# Altium PCB pcb.PcbDoc
Units mm, origin at the board's own origin, x right, y up, seen from the top; angles counter-clockwise.
Board outline 88.52 x 31.24 mm, 2 copper layers (Top Layer, Bottom Layer); 41 components, 14 nets, 98 pads, 108 vias.
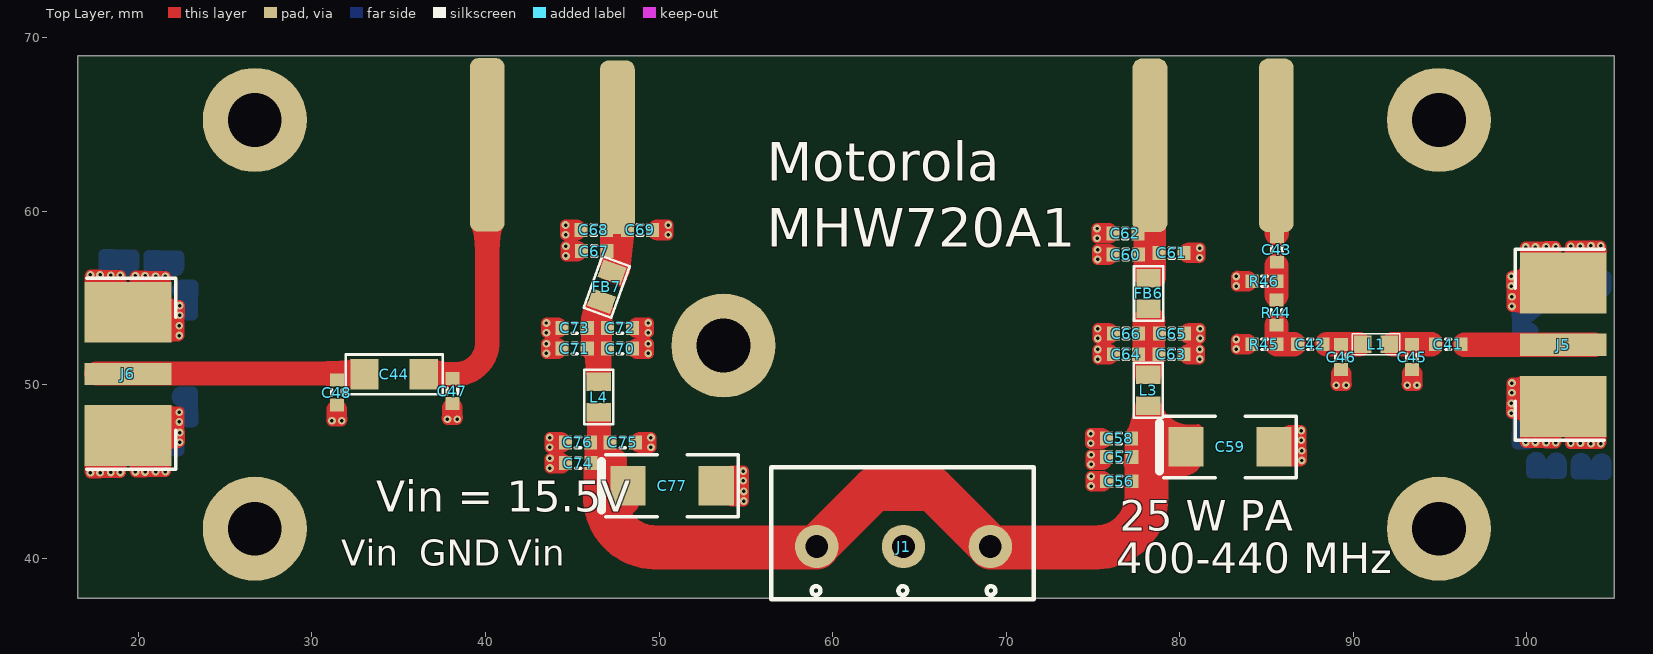
[diagram p0: Top Layer view]
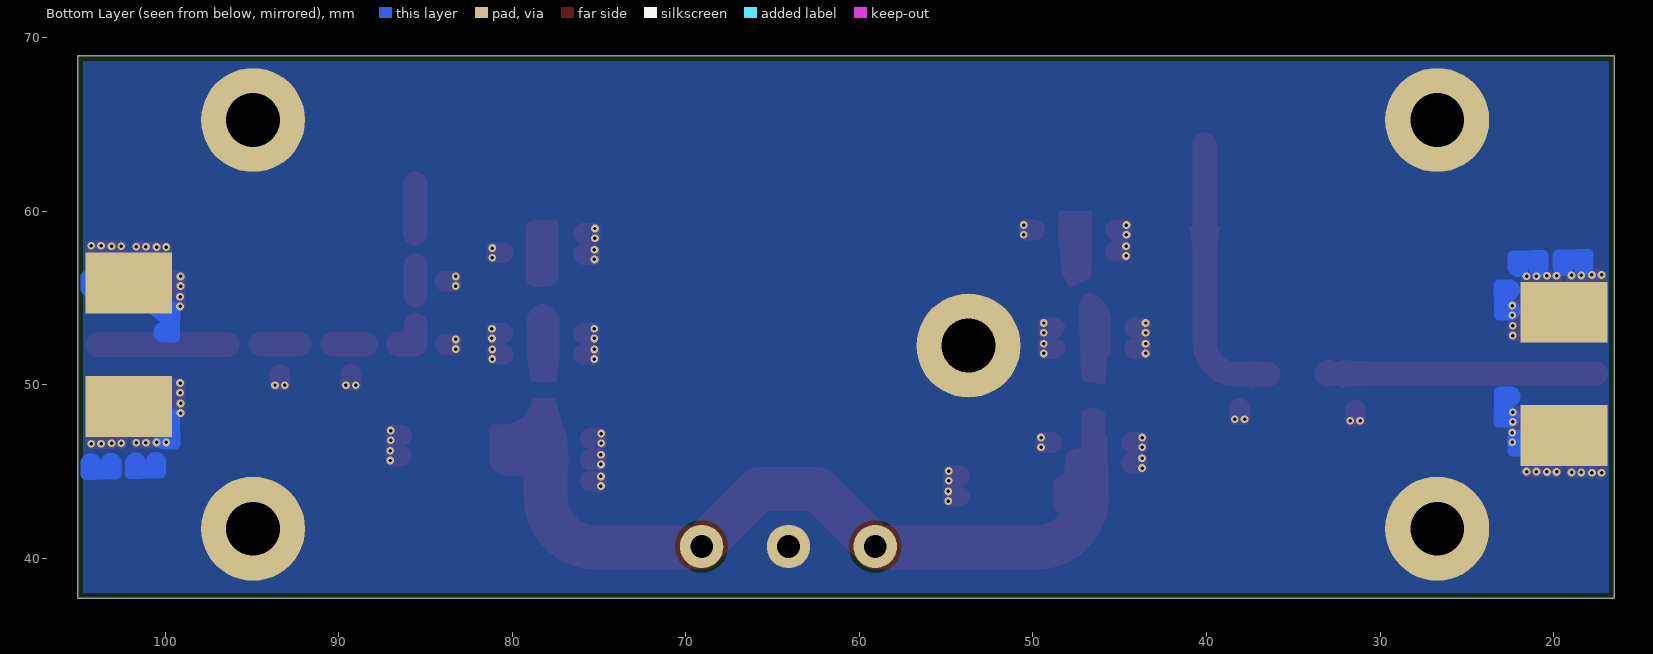
[diagram p1: Bottom Layer view, seen from below]
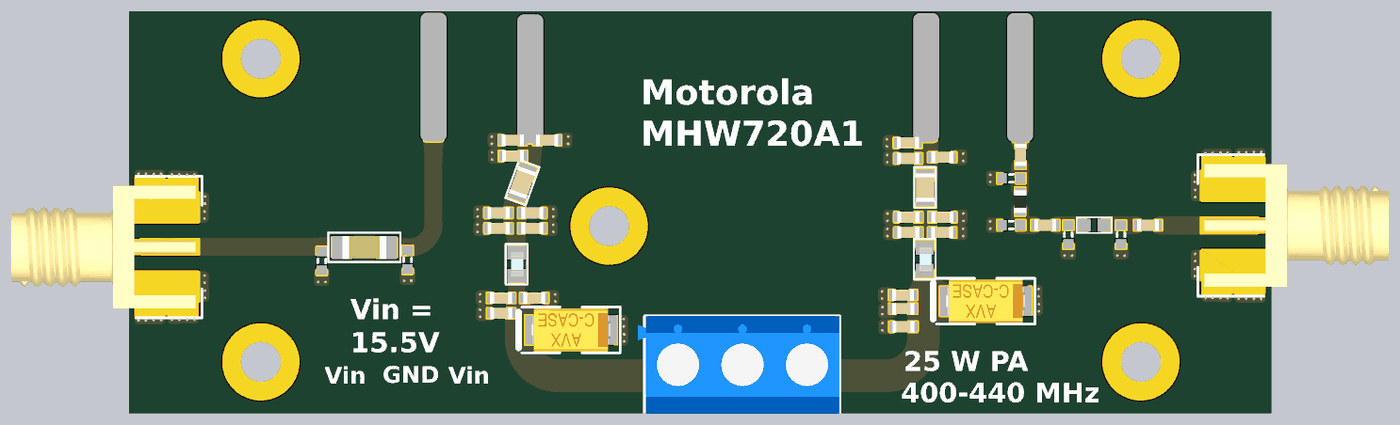
[diagram p2: 3D render of the assembled board from above, using the file's embedded part models]

## Layer stack, top to bottom
Top Solder: solder mask 0.0102, Solder Resist, Dk 3.5
Top Layer: signal copper 0.0356
Dielectric 1: dielectric 0.32, FR-4, Dk 4.8
Bottom Layer: signal copper 0.0356
Bottom Solder: solder mask 0.0102, Solder Resist, Dk 3.5

## Board outline
16.51,37.719 16.51,68.961 105.029,68.961 105.029,37.719

## Design rules (kind name [scope] priority, off if disabled: settings)
BoardOutlineClearance [OnBottomLayer  Or OnTopLayer] p1: gap=0.3 ignorepadtopadclearanceinfootprint=FALSE
Clearance [All] p1: gap=0.127 ignorepadtopadclearanceinfootprint=TRUE except(0.254: Arc-Poly Track-Poly SMDPad-Poly THPad-Poly Via-Poly Fill-Poly Poly-Poly Poly-Region Poly-Text Poly-Hole)
HoleSize [All] p1: absolutevalues=TRUE maxlimit=5.08 minlimit=0.2 maxpercent=80.000 minpercent=20.000
MinimumSolderMaskSliver [All] p1: minsoldermaskwidth=0
PlaneConnect [All] p1: planeconnectstyle=Direct reliefexpansion=0.508 reliefentries=4 reliefconductorwidth=0.254 reliefairgap=0.254
PolygonConnect [All] p1: connectstyle=Direct reliefconductorwidth=0.254 reliefentries=4 polygonreliefangle="90 Angle" airgapwidth=0.254
RoutingVias [All] p1: holewidth=0.2 width=0.45 viastyle="Through Hole" minholewidth=0.2 minwidth=0.45 maxholewidth=0.2 maxwidth=0.45
SilkToSilkClearance [All] p1: silktosilkclearance=0
SilkToSolderMaskClearance [IsPad] p1: minsilkscreentomaskgap=0 clearancetoexposedcopper=TRUE
SolderMaskExpansion [All] p1: expansion=0.102
Width [All] p1: maxlimit=25.4 minlimit=0.127 preferedwidth=0.254 minimp=50.000000 maximp=50.000000 favimp=50.000000
25 further rules are at their usual default settings.

## Components (designator, comment, footprint, x,y, rotation, side; value= is the part's Value field where it differs from the comment)
C41 "Ceramic C0G" C_0603_1608 95.474,52.341 r180 top value=1nF
C42 "Ceramic C0G" C_0603_1608 87.524,52.341 r180 top value=1nF
C43 "Ceramic C0G" C_0603_1608 85.593,57.802 r90 top value=1nF
C44 "Ceramic C0G" C_1206_3216 34.733,50.613 r180 top value=1nF
C45 "-" C_NC_0603_1608 93.391,51.605 r270 top value=NC
C46 "-" C_NC_0603_1608 89.302,51.605 r270 top value=NC
C47 "-" C_NC_0603_1608 38.086,49.648 r270 top value=NC
C48 "-" C_NC_0603_1608 31.431,49.56 r270 top value=NC
C56 "Ceramic C0G" C_0603_1608 76.519,44.452 r180 top value=1nF
C57 "Ceramic X7R" C_0603_1608 76.511,45.847 r180 top value=100nF
C58 "Ceramic X7R" C_0603_1608 76.493,46.915 r180 top value=1uF
C59 "Tantalum Capacitor" CT_2312_6032 82.898,46.431 r180 top value=22uF
C60 "Ceramic C0G" C_0603_1608 76.891,57.515 r180 top value=2.2pF
C61 "Ceramic C0G" C_0603_1608 79.531,57.609 r0 top value=330pF
C62 "Ceramic C0G" C_0603_1608 76.866,58.734 r180 top value=1nF
C63 "Ceramic C0G" C_0603_1608 79.522,51.767 r0 top value=2.2pF
C64 "Ceramic C0G" C_0603_1608 76.906,51.767 r180 top value=1nF
C65 "Ceramic X7R" C_0603_1608 79.547,52.961 r0 top value=100nF
C66 "Ceramic X7R" C_0603_1608 76.906,52.961 r180 top value=1uF
C67 "Ceramic C0G" C_0603_1608 46.26,57.712 r180 top value=2.2pF
C68 "Ceramic C0G" C_0603_1608 46.234,58.931 r180 top value=330pF
C69 "Ceramic C0G" C_0603_1608 48.901,58.931 r0 top value=1nF
C70 "Ceramic C0G" C_0603_1608 47.752,52.095 r0 top value=2.2pF
C71 "Ceramic C0G" C_0603_1608 45.136,52.095 r180 top value=1nF
C72 "Ceramic X7R" C_0603_1608 47.752,53.289 r0 top value=100nF
C73 "Ceramic X7R" C_0603_1608 45.136,53.289 r180 top value=1uF
C74 "Ceramic C0G" C_0603_1608 45.339,45.491 r180 top value=1nF
C75 "Ceramic X7R" C_0603_1608 47.904,46.685 r0 top value=100nF
C76 "Ceramic X7R" C_0603_1608 45.327,46.685 r180 top value=1uF
C77 "Tantalum Capacitor" CT_2312_6032 50.749,44.196 r180 top value=22uF
FB6 "Ferrite bead" FB_0805_2012 78.201,55.272 r270 top value=BLM21PG300SN1D
FB7 "Ferrite bead" FB_0805_2012 46.985,55.651 r250 top value=BLM21PG300SN1D
J1 "ARK3" J_ARK3 64.084,40.691 r180 top value=DG301-5.0-03P-12-18A(H)
J5 "SMA EDGE" J_SMA_EDGE 104.594,52.316 r180 top
J6 "SMA EDGE" J_SMA_EDGE 16.892,50.636 r0 top
L1 "" L_NC_0603_1608 91.308,52.341 r180 top value=NC
L3 "Inductor" L_0805_2012 78.181,49.694 r270 top value=560nH
L4 "Inductor" L_0805_2012 46.529,49.301 r270 top value=560nH
R44 "Resistor" R_0603_1608 85.568,54.17 r90 top value=0R
R45 "Resistor" R_NC_0603_1608 84.882,52.341 r180 top value=NC
R46 "Resistor" R_NC_0603_1608 84.882,55.974 r180 top value=NC

## Footprints (in the part's own frame and the unit in brackets; to place one, negate y for a bottom-side part, rotate by r counter-clockwise, add the part's x,y. Pads: shape width x height; smd on the part's side, far side on the other; paste and mask are expansions set on the pad)
C_0603_1608 [mm]
  rect 0.75x0.8 smd: 1(-0.725,0) 2(0.725,0)
  silkscreen extent -0.15,-0.3 0.15,0.3, body extent -0.85,-0.45 0.85,0.45, height 0.89
C_1206_3216 [mil]
  rect 64x70 smd: 1(-67,0) 2(67,0)
  silkscreen extent -110,-45 110,45, body extent -67,-35 67,35, height 39
C_NC_0603_1608 [mm]
  rect 0.75x0.8 smd: 1(-0.725,0) 2(0.725,0)
  silkscreen extent -0.15,-0.3 0.15,0.3, body extent -0.85,-0.45 0.85,0.45, height 0.89
CT_2312_6032 [mm]
  rect 2.03x2.28 smd: 1(2.54,0) 2(-2.54,0)
  silkscreen extent -3.81,-1.78 4.06,1.78, body extent -3.05,-1.67 3.05,1.68, height 2.7
FB_0805_2012 [mil]
  rect 42x55 smd: 1(-35,0) 2(35,0)
  silkscreen extent -62,-33 62,33, body extent -43,-29 44,29, height 53
J_ARK3 [mm]
  round 2.5 hole 1.3: 1(-5,0) 2(0,0) 3(5,0)
  silkscreen extent -7.49,-4.57 7.62,3.05, body extent -7.46,-4.6 8.14,3, height 10.05
J_SMA_EDGE [mm]
  rect 5x1.27 smd paste-5: 1(2.5,0)
  rect 5x3.5 smd paste-5: 2(2.5,3.556) 2(2.5,-3.556)
  rect 5x3.5 smd far side paste-5: 2(2.5,3.556) 2(2.5,-3.556)
  silkscreen extent 0.13,-5.5 5.25,5.5, body extent -9.53,-4.77 4.75,4.76, height 4.5
L_0805_2012 [mil]
  rect 42x55 smd: 1(-35,0) 2(35,0)
  silkscreen extent -62,-33 62,33, body extent -39,-18 39,23, height 50
L_NC_0603_1608 [mil]
  rect 39x40 smd: 1(-30,0) 2(30,0)
  silkscreen extent -54,-24 54,24, body extent -31,-20 31,20, height 31
R_0603_1608 [mm]
  rect 0.75x0.8 smd: 1(-0.725,0) 2(0.725,0)
  silkscreen extent -0.15,-0.3 0.15,0.3, body extent -0.87,-0.48 0.88,0.47, height 0.54
R_NC_0603_1608 [mm]
  rect 0.75x0.8 smd: 1(-0.725,0) 2(0.725,0)
  silkscreen extent -0.15,-0.3 0.15,0.3, body extent -0.87,-0.48 0.88,0.47, height 0.54

## Part data
C41 C42 C43 C56 C62 C64 C69 C71 C74: library part C_1nF_50V_C0G_0603_5, "Capacitor", dielectric=C0G, Manufacturer=Samsung, Manufacturer Part Number=CL10C102JB8NNNC, Tolerance (%)=5, voltage=50V, HelpURL=http://www.tme.eu/pl/Document/7da762c1dbaf553c64ad9c40d3603826/mlcc_samsung.pdf, Part Number=C_1nF_50V_C0G_0603_5, SCH_Footprint=0603, Supplier 1=TME, Supplier 2="RS Components", Supplier 3=Farnell, Supplier 4=Mouser, Supplier 5=Digi-Key, Supplier Part Number 1=CL10C102JB8NNNC
C44: library part C_1nF_2kV_C0G_1206_10, "Capacitor", dielectric=C0G, Manufacturer=AVX, Manufacturer Part Number=1206GC102KAT1A, Tolerance (%)=10, voltage=2kV, HelpURL=http://www.tme.eu/pl/Document/667fe6e7748c0ed1675574c6bf64b751/AVX_X7R.pdf, Part Number=C_1nF_2kV_C0G_1206_10, SCH_Footprint=1206, Supplier 1=TME, Supplier 2="RS Components", Supplier 3=Farnell, Supplier 4=Mouser, Supplier 5=Digi-Key, Supplier Part Number 1=1206GC102KAT1A
C45 C46 C47 C48: library part C_GENERIC_0603, "Capacitor", Tolerance (%)=0, voltage=0V, dielectric=-, HelpURL=http://-, Manufacturer=-, Manufacturer Part Number=-, Part Number=C_GENERIC_0603, SCH_Footprint=0603, Supplier 1=TME, Supplier 2="RS Components", Supplier 3=Farnell, Supplier 4=Mouser, Supplier 5=Digi-Key
C57 C65 C72 C75: library part C_100nF_50V_X7R_0603_5, "Capacitor", dielectric=X7R, Manufacturer=Samsung, Manufacturer Part Number=CL10B104JB8NNNC, Tolerance (%)=5, voltage=50V, HelpURL=http://www.tme.eu/pl/Document/4a42202b32dab16128fe107dd69598cc/samsung-chip-cap.pdf, Part Number=C_100nF_50V_X7R_0603_5, SCH_Footprint=0603, Supplier 1=TME, Supplier 2="RS Components", Supplier 3=Farnell, Supplier 4=Mouser, Supplier 5=Digi-Key, Supplier Part Number 1=CL10B104JB8NNNC
C58 C66 C73 C76: library part C_1uF_25V_X7R_0603_10, "Capacitor", dielectric=X7R, Manufacturer=Samsung, Manufacturer Part Number=CL10B105KA8NNNC, Tolerance (%)=10, voltage=25V, HelpURL=http://www.tme.eu/pl/Document/4a42202b32dab16128fe107dd69598cc/samsung-chip-cap.pdf, Part Number=C_1uF_25V_X7R_0603_10, SCH_Footprint=0603, Supplier 1=TME, Supplier 2="RS Components", Supplier 3=Farnell, Supplier 4=Mouser, Supplier 5=Digi-Key, Supplier Part Number 1=CL10B105KA8NNNC
C59 C77: library part CT_22uF_16V_TA2O5_2312_10, "Capacitor", dielectric=TA2O5, Manufacturer=Kemet, Manufacturer Part Number=T494C226K016AT, Tolerance (%)=10, voltage=16V, HelpURL=https://content.kemet.com/datasheets/KEM_T2008_T494.pdf, Part Number=CT_22uF_16V_TA2O5_2312_10, SCH_Footprint=2312, Supplier 1=TME, Supplier 2="RS Components", Supplier 3=Farnell, Supplier 4=Mouser, Supplier 5=Digi-Key, Supplier Part Number 1=T494C226K016AT, Supplier Part Number 2=1726639, Supplier Part Number 3=2762195, Supplier Part Number 4=80-T494C226K016, Supplier Part Number 5=399-3845-1-ND
C60 C63 C67 C70: library part C_2.2pF_100V_C0G_0603_5, "Capacitor", dielectric=C0G, Manufacturer=AVX, Manufacturer Part Number=06031A2R2BAT2A, Tolerance (%)=5, voltage=100V, HelpURL=https://datasheet.octopart.com/06031A2R2BAT2A-AVX-datasheet-167032.pdf, Part Number=C_2.2pF_100V_C0G_0603_5, SCH_Footprint=0603, Supplier 1=TME, Supplier 2="RS Components", Supplier 3=Farnell, Supplier 4=Mouser, Supplier 5=Digi-Key, Supplier Part Number 3=2579012, Supplier Part Number 4=581-06031A2R2BAT2A, Supplier Part Number 5=478-3686-1-ND
C61 C68: library part C_330pF_50V_C0G_0603_5, "Capacitor", dielectric=C0G, Manufacturer=Murata, Manufacturer Part Number=GRM1885C1H331JA01D, Tolerance (%)=5, voltage=50V, HelpURL=http://www.mouser.com/ds/2/281/c02e-2905.pdf, Part Number=C_330pF_50V_C0G_0603_5, SCH_Footprint=0603, Supplier 1=TME, Supplier 2="RS Components", Supplier 3=Farnell, Supplier 4=Mouser, Supplier 5=Digi-Key, Supplier Part Number 1=GRM1885C1H331JA01D
FB6 FB7: library part FB_BLM21PG300SN1D, "Ferrite Bead", Current=3A, Manufacturer=Murata, Manufacturer Part Number=BLM21PG300SN1D, Resistance=30R, HelpURL=http://www.mouser.com/ds/2/281/c31e-794748.pdf, Part Number=FB_BLM21PG300SN1D, SCH_Footprint=0805, Supplier 1=TME, Supplier 2="RS Components", Supplier 3=Farnell, Supplier 4=Mouser, Supplier 5=Digi-Key, Supplier Part Number 1=BLM21PG300SN1D, Supplier Part Number 2=7241536, Supplier Part Number 3=1515662, Supplier Part Number 4=81-BLM21P300S, Supplier Part Number 5=490-1052-1-ND
J1: library part J_TB-5.0-P-3P, "ARK Screw terminal, 3-Pin", Manufacturer="DEGSON ELECTRONICS", Manufacturer Part Number=DG301-5.0-03P-12-18A(H), Supplier Part Number 1=DG301-5.0-3/6B, Component Type=Standard, HelpURL=https://datasheet.octopart.com/DG301-5.0-03P-12-18A%28H%29-Degson-datasheet-17801202.pdf, Part Number=J_TB-5.0-P-3P, SCH_Footprint=ARK3, Supplier 1=TME, Supplier 2="RS Components", Supplier 3=Farnell, Supplier 4=Mouser, Supplier 5=Digi-Key
J5 J6: library part J_SMA_EDGE_UNIVERSAL, "SMA connector", Component Type=Standard, Part Number=J_SMA_EDGE_UNIVERSAL, SCH_Footprint="SMA EDGE", Supplier 1=TME, Supplier 2="RS Components", Supplier 3=Farnell, Supplier 4=Mouser, Supplier 5=Digi-Key
L1: library part L_0603, "Induction", Part Number=L_0603, SCH_Footprint=0603, Supplier 1=TME, Supplier 2="RS Components", Supplier 3=Farnell, Supplier 4=Mouser, Supplier 5=Digi-Key
L3 L4: library part L_560nH_1.7A_0805, "Induction", Current=1.7A, Manufacturer=Wurth, Manufacturer Part Number=74479974156, Resistance=100mR, HelpURL=https://datasheet.octopart.com/74479974156-W%C3%BCrth-Elektronik-datasheet-62333476.pdf, Part Number=L_560nH_1.7A_0805, SCH_Footprint=0805, Supplier 1=TME, Supplier 2="RS Components", Supplier 3=Farnell, Supplier 4=Mouser, Supplier 5=Digi-Key, Supplier Part Number 2=923-6378, Supplier Part Number 3=2543275, Supplier Part Number 4=710-74479974156, Supplier Part Number 5=732-9693-1-ND
R44: library part R_0R_0603_5, Manufacturer=Samsung, Manufacturer Part Number=RC1608J000CS, Power=100mW, Tolerance=5%, voltage=50V, HelpURL=http://www.samsungsem.com/kr/support/product-search/chip-resistor/RC1608J000CS.jsp, Part Number=R_0R_0603_5, SCH_Footprint=0603, Supplier 1=TME, Supplier 2="RS Components", Supplier 3=Farnell, Supplier 4=Mouser, Supplier 5=Digi-Key, Supplier Part Number 5=1276-3510-1-ND
R45 R46: library part R_GENERIC_0603, Part Number=R_GENERIC_0603, SCH_Footprint=0603, Supplier 1=TME, Supplier 2="RS Components", Supplier 3=Farnell, Supplier 4=Mouser, Supplier 5=Digi-Key

## Free pads (board coordinates)
  round 6 hole 3.1: 6(26.708,41.719) 6(26.708,65.266) 6(53.708,52.266) 6(94.933,41.719) 6(94.933,65.266)
  rrect50% 2x10 smd: in(85.568,63.8) out(40.095,63.837) Vcc1(78.287,63.8) Vcc2(47.6,63.7)

## Via types
v1: diameter 0.45, hole 0.2, Top Layer to Bottom Layer, tented both sides, 108 vias

## Nets (pads, with @x,y where several pads share a name; then routed paths per layer and width w, separated by ;. In a path a pad name is that pad's centre, name@x,y a point inside that pad or via, vN(x,y) a via of type N, cw(c..) or ccw(c..) an arc to the next point about the centre after c; other vN are vias at no path point)
GND: C45.2 C46.2 C47.2 C48.2 C56.2 C57.2 C58.2 C59.2 C60.2 C61.2 C62.2 C63.2 C64.2 C65.2 C66.2 C67.2 C68.2 C69.2 C70.2 C71.2 C72.2 C73.2 C74.2 C75.2 C76.2 C77.2 J1.2 J5.2 J6.2 pad.6 R45.2 R46.2 | length 224.7
  Top Layer w0.635: J6.2@17.233,45.556 v1(17.233,44.935) v1(17.792,44.935) ; J6.2@17.512,45.836 cw(c17.512,45.556) 17.792,45.556 v1(17.792,44.935) ; v1(17.792,44.935) cw(c17.817,44.935) 17.817,44.961 v1(18.401,44.961) ; v1(17.792,56.338) ccw(c17.817,56.338) 17.817,56.312 v1(18.401,56.312) ; v1(17.792,56.338) 17.792,55.716 cw(c17.512,55.716) 17.512,55.437 cw(c17.512,55.716) 17.233,55.716 v1(17.233,56.338) v1(17.792,56.338) ; v1(18.401,44.961) 18.401,45.582 cw(c18.681,45.582) 18.681,45.861 cw(c18.681,45.582) 18.96,45.582 v1(18.96,44.961) v1(18.401,44.961) ; v1(18.401,56.312) 18.401,55.691 ccw(c18.681,55.691) 18.681,55.412 ccw(c18.681,55.691) 18.96,55.691 v1(18.96,56.312) v1(18.401,56.312) ; v1(20.383,44.986) cw(c20.408,44.986) 20.408,45.011 v1(20.992,45.011) ; v1(20.383,44.986) 20.383,45.607 ccw(c20.103,45.607) 20.103,45.887 ccw(c20.103,45.607) 19.824,45.607 v1(19.824,44.986) v1(20.383,44.986) ; v1(20.383,56.287) ccw(c20.408,56.287) 20.408,56.261 v1(20.992,56.261) ; v1(20.383,56.287) 20.383,55.666 cw(c20.103,55.666) 20.103,55.386 cw(c20.103,55.666) 19.824,55.666 v1(19.824,56.287) v1(20.383,56.287) ; v1(20.992,45.011) 20.992,45.633 cw(c21.272,45.633) 21.272,45.912 cw(c21.272,45.633) 21.551,45.633 v1(21.551,45.011) v1(20.992,45.011) ; v1(20.992,56.261) 20.992,55.64 ccw(c21.272,55.64) 21.272,55.361 ccw(c21.272,55.64) 21.551,55.64 v1(21.551,56.261) v1(20.992,56.261) ; v1(22.35,47.868) 22.35,47.284 ccw(c22.375,47.284) v1(22.375,47.258) ; v1(22.35,47.868) 21.729,47.868 cw(c21.729,48.147) 21.449,48.147 cw(c21.729,48.147) 21.729,48.427 v1(22.35,48.427) v1(22.35,47.868) ; v1(22.35,53.405) 22.35,53.989 cw(c22.375,53.989) v1(22.375,54.015) ; v1(22.35,53.405) 21.729,53.405 ccw(c21.729,53.126) 21.449,53.126 ccw(c21.729,53.126) 21.729,52.846 v1(22.35,52.846) v1(22.35,53.405) ; v1(22.375,47.258) v1(22.375,46.699) 21.754,46.699 cw(c21.754,46.979) 21.475,46.979 cw(c21.754,46.979) 21.754,47.258 v1(22.375,47.258) ; v1(22.375,54.015) v1(22.375,54.573) 21.754,54.573 ccw(c21.754,54.294) 21.475,54.294 ccw(c21.754,54.294) 21.754,54.015 v1(22.375,54.015) ; v1(54.85,44.475) 54.229,44.475 cw(c54.229,44.755) 53.95,44.755 cw(c54.229,44.755) 54.229,45.034 v1(54.85,45.034) v1(54.85,44.475) ; v1(54.85,44.475) 54.85,43.891 ccw(c54.876,43.891) v1(54.876,43.866) ; v1(54.876,43.866) v1(54.876,43.307) 54.254,43.307 cw(c54.254,43.586) 53.975,43.586 cw(c54.254,43.586) 54.254,43.866 v1(54.876,43.866) ; v1(86.999,46.814) 86.378,46.814 cw(c86.378,47.093) 86.098,47.093 cw(c86.378,47.093) 86.378,47.373 v1(86.999,47.373) v1(86.999,46.814) ; v1(86.999,46.814) 86.999,46.23 ccw(c87.024,46.23) v1(87.024,46.204) ; v1(87.024,46.204) 86.403,46.204 ccw(c86.403,45.925) 86.124,45.925 ccw(c86.403,45.925) 86.403,45.645 v1(87.024,45.645) v1(87.024,46.204) ; v1(99.111,48.938) ccw(c99.111,48.963) 99.136,48.963 v1(99.136,49.547) ; v1(99.111,48.938) 99.732,48.938 cw(c99.732,48.658) 100.012,48.658 cw(c99.732,48.658) 99.732,48.379 v1(99.111,48.379) v1(99.111,48.938) ; v1(99.111,55.694) cw(c99.111,55.669) 99.136,55.669 v1(99.136,55.085) ; v1(99.111,55.694) 99.732,55.694 ccw(c99.732,55.974) 100.012,55.974 ccw(c99.732,55.974) 99.732,56.253 v1(99.111,56.253) v1(99.111,55.694) ; v1(99.136,49.547) 99.758,49.547 ccw(c99.758,49.827) 100.037,49.827 ccw(c99.758,49.827) 99.758,50.106 v1(99.136,50.106) v1(99.136,49.547) ; v1(99.136,55.085) 99.758,55.085 cw(c99.758,54.805) 100.037,54.805 cw(c99.758,54.805) 99.758,54.526 v1(99.136,54.526) v1(99.136,55.085) ; v1(100.494,46.691) 100.494,47.312 ccw(c100.215,47.312) 100.215,47.592 ccw(c100.215,47.312) 99.935,47.312 v1(99.935,46.691) v1(100.494,46.691) ; v1(100.494,46.691) 101.078,46.691 cw(c101.078,46.666) v1(101.104,46.666) ; v1(100.494,57.941) 101.078,57.941 ccw(c101.078,57.966) v1(101.104,57.966) ; v1(100.494,57.941) v1(99.935,57.941) 99.935,57.32 ccw(c100.215,57.32) 100.215,57.04 ccw(c100.215,57.32) 100.494,57.32 v1(100.494,57.941) ; v1(101.104,46.666) 101.104,47.287 cw(c101.383,47.287) 101.383,47.566 cw(c101.383,47.287) 101.663,47.287 v1(101.663,46.666) v1(101.104,46.666) ; v1(101.104,57.966) 101.104,57.345 ccw(c101.383,57.345) 101.383,57.066 ccw(c101.383,57.345) 101.663,57.345 v1(101.663,57.966) v1(101.104,57.966) ; v1(103.085,46.64) 103.085,47.261 ccw(c102.806,47.261) 102.806,47.541 ccw(c102.806,47.261) 102.526,47.261 v1(102.526,46.64) v1(103.085,46.64) ; v1(103.085,46.64) 103.669,46.64 cw(c103.669,46.615) v1(103.695,46.615) ; v1(103.085,57.992) 103.669,57.992 ccw(c103.669,58.017) v1(103.695,58.017) ; v1(103.085,57.992) v1(102.526,57.992) 102.526,57.371 ccw(c102.806,57.371) 102.806,57.091 ccw(c102.806,57.371) 103.085,57.371 v1(103.085,57.992) ; v1(103.695,46.615) 103.695,47.236 cw(c103.974,47.236) 103.974,47.515 cw(c103.974,47.236) 104.253,47.236 v1(104.253,46.615) v1(103.695,46.615) ; v1(103.695,58.017) 103.695,57.396 ccw(c103.974,57.396) 103.974,57.117 ccw(c103.974,57.396) 104.253,57.396 v1(104.253,58.017) v1(103.695,58.017) ; v1(31.152,47.935) 31.152,48.556 cw(c31.431,48.556) C48.2 cw(c31.431,48.556) 31.711,48.556 v1(31.711,47.935) v1(31.152,47.935) ; v1(37.807,48.022) 37.807,48.644 cw(c38.086,48.644) C47.2 cw(c38.086,48.644) 38.366,48.644 v1(38.366,48.022) v1(37.807,48.022) ; v1(43.51,51.816) 44.131,51.816 ccw(c44.131,52.095) C71.2 ccw(c44.131,52.095) 44.131,52.375 v1(43.51,52.375) v1(43.51,51.816) ; v1(43.51,53.01) 44.131,53.01 ccw(c44.131,53.289) C73.2 ccw(c44.131,53.289) 44.131,53.569 v1(43.51,53.569) v1(43.51,53.01) ; v1(43.702,46.406) 44.323,46.406 ccw(c44.323,46.685) C76.2 ccw(c44.323,46.685) 44.323,46.965 v1(43.702,46.965) v1(43.702,46.406) ; v1(43.713,45.212) 44.335,45.212 ccw(c44.335,45.491) C74.2 ccw(c44.335,45.491) 44.335,45.771 v1(43.713,45.771) v1(43.713,45.212) ; v1(44.609,58.651) 45.23,58.651 ccw(c45.23,58.931) C68.2 ccw(c45.23,58.931) 45.23,59.21 v1(44.609,59.21) v1(44.609,58.651) ; v1(44.634,57.432) 45.255,57.432 ccw(c45.255,57.712) C67.2 ccw(c45.255,57.712) 45.255,57.991 v1(44.634,57.991) v1(44.634,57.432) ; C70.2 cw(c48.756,52.095) 48.756,52.375 v1(49.378,52.375) v1(49.378,51.816) 48.756,51.816 cw(c48.756,52.095) C70.2 ; C72.2 cw(c48.756,53.289) 48.756,53.569 v1(49.378,53.569) v1(49.378,53.01) 48.756,53.01 cw(c48.756,53.289) C72.2 ; C75.2 cw(c48.909,46.685) 48.909,46.965 v1(49.53,46.965) v1(49.53,46.406) 48.909,46.406 cw(c48.909,46.685) C75.2 ; C69.2 cw(c49.906,58.931) 49.906,59.21 v1(50.527,59.21) v1(50.527,58.651) 49.906,58.651 cw(c49.906,58.931) C69.2 ; v1(74.868,46.636) 75.489,46.636 ccw(c75.489,46.915) C58.2 ccw(c75.489,46.915) 75.489,47.195 v1(74.868,47.195) v1(74.868,46.636) ; v1(74.893,44.172) 75.514,44.172 ccw(c75.514,44.452) C56.2 ccw(c75.514,44.452) 75.514,44.731 v1(74.893,44.731) v1(74.893,44.172) ; v1(74.893,45.417) 75.514,45.417 ccw(c75.514,45.696) 75.794,45.696 ccw(c75.514,45.696) 75.514,45.976 v1(74.893,45.976) v1(74.893,45.417) ; v1(75.24,58.455) 75.861,58.455 ccw(c75.861,58.734) C62.2 ccw(c75.861,58.734) 75.861,59.014 v1(75.24,59.014) v1(75.24,58.455) ; v1(75.266,57.236) 75.887,57.236 ccw(c75.887,57.515) C60.2 ccw(c75.887,57.515) 75.887,57.794 v1(75.266,57.794) v1(75.266,57.236) ; v1(75.28,51.487) 75.901,51.487 ccw(c75.901,51.767) C64.2 ccw(c75.901,51.767) 75.901,52.046 v1(75.28,52.046) v1(75.28,51.487) ; v1(75.28,52.681) 75.901,52.681 ccw(c75.901,52.961) C66.2 ccw(c75.901,52.961) 75.901,53.24 v1(75.28,53.24) v1(75.28,52.681) ; C63.2 cw(c80.526,51.767) 80.526,52.046 v1(81.147,52.046) v1(81.147,51.487) 80.526,51.487 cw(c80.526,51.767) C63.2 ; C61.2 cw(c80.536,57.609) 80.536,57.888 v1(81.157,57.888) v1(81.157,57.329) 80.536,57.329 cw(c80.536,57.609) C61.2 ; C65.2 cw(c80.552,52.961) 80.552,53.24 v1(81.173,53.24) v1(81.173,52.681) 80.552,52.681 cw(c80.552,52.961) C65.2 ; v1(83.257,52.062) 83.878,52.062 ccw(c83.878,52.341) R45.2 ccw(c83.878,52.341) 83.878,52.621 v1(83.257,52.621) v1(83.257,52.062) ; v1(83.257,55.694) 83.878,55.694 ccw(c83.878,55.974) R46.2 ccw(c83.878,55.974) 83.878,56.253 v1(83.257,56.253) v1(83.257,55.694) ; v1(89.022,49.979) 89.022,50.6 cw(c89.302,50.6) C46.2 cw(c89.302,50.6) 89.581,50.6 v1(89.581,49.979) v1(89.022,49.979) ; v1(93.112,49.979) 93.112,50.6 cw(c93.391,50.6) C45.2 cw(c93.391,50.6) 93.671,50.6 v1(93.671,49.979) v1(93.112,49.979)
  Bottom Layer w0.635: J6.2@18.567,46.115 cw(c18.593,46.115) 18.593,46.14 J6.2@19.177,46.14 ; J6.2@18.567,46.115 18.567,46.736 ccw(c18.288,46.736) 18.288,47.015 ccw(c18.288,46.736) 18.009,46.736 18.009,46.115 J6.2@18.567,46.115 ; 18.567,57.517 ccw(c18.593,57.517) 18.593,57.492 19.177,57.492 ; 18.567,57.517 18.009,57.517 18.009,56.896 ccw(c18.288,56.896) 18.288,56.617 ccw(c18.288,56.896) 18.567,56.896 18.567,57.517 ; J6.2@19.177,46.14 19.177,46.761 cw(c19.456,46.761) 19.456,47.041 cw(c19.456,46.761) 19.736,46.761 19.736,46.14 J6.2@19.177,46.14 ; 19.177,57.492 19.177,56.871 ccw(c19.456,56.871) 19.456,56.591 ccw(c19.456,56.871) 19.736,56.871 19.736,57.492 19.177,57.492 ; J6.2@21.158,46.166 cw(c21.184,46.166) 21.184,46.191 J6.2@21.768,46.191 ; J6.2@21.158,46.166 21.158,46.787 ccw(c20.879,46.787) 20.879,47.066 ccw(c20.879,46.787) 20.599,46.787 20.599,46.166 J6.2@21.158,46.166 ; 21.158,57.466 ccw(c21.184,57.466) 21.184,57.441 21.768,57.441 ; 21.158,57.466 20.599,57.466 20.599,56.845 ccw(c20.879,56.845) 20.879,56.566 ccw(c20.879,56.845) 21.158,56.845 21.158,57.466 ; J6.2@21.768,46.191 21.768,46.812 cw(c22.047,46.812) 22.047,47.092 cw(c22.047,46.812) 22.327,46.812 22.327,46.191 J6.2@21.768,46.191 ; 21.768,57.441 21.768,56.82 ccw(c22.047,56.82) 22.047,56.54 ccw(c22.047,56.82) 22.327,56.82 22.327,57.441 21.768,57.441 ; 23.126,49.047 23.126,48.463 ccw(c23.151,48.463) 23.151,48.438 ; 23.126,49.047 22.504,49.047 cw(c22.504,49.327) 22.225,49.327 cw(c22.504,49.327) 22.504,49.606 23.126,49.606 23.126,49.047 ; 23.126,54.585 22.504,54.585 ccw(c22.504,54.305) 22.225,54.305 ccw(c22.504,54.305) 22.504,54.026 23.126,54.026 23.126,54.585 ; 23.126,54.585 23.126,55.169 cw(c23.151,55.169) 23.151,55.194 ; 23.151,48.438 22.53,48.438 ccw(c22.53,48.158) 22.25,48.158 ccw(c22.53,48.158) 22.53,47.879 23.151,47.879 23.151,48.438 ; 23.151,55.194 23.151,55.753 22.53,55.753 ccw(c22.53,55.474) 22.25,55.474 ccw(c22.53,55.474) 22.53,55.194 23.151,55.194 ; 99.429,47.168 ccw(c99.429,47.193) 99.455,47.193 99.455,47.777 ; 99.429,47.168 100.051,47.168 cw(c100.051,46.888) 100.33,46.888 cw(c100.051,46.888) 100.051,46.609 99.429,46.609 99.429,47.168 ; 99.429,53.924 cw(c99.429,53.899) 99.455,53.899 99.455,53.315 ; 99.429,53.924 100.051,53.924 ccw(c100.051,54.204) 100.33,54.204 ccw(c100.051,54.204) 100.051,54.483 99.429,54.483 99.429,53.924 ; 99.455,47.777 100.076,47.777 ccw(c100.076,48.057) 100.355,48.057 ccw(c100.076,48.057) 100.076,48.336 99.455,48.336 99.455,47.777 ; 99.455,53.315 100.076,53.315 cw(c100.076,53.035) 100.355,53.035 cw(c100.076,53.035) 100.076,52.756 99.455,52.756 99.455,53.315 ; 100.813,44.921 100.813,45.542 ccw(c100.533,45.542) 100.533,45.822 ccw(c100.533,45.542) 100.254,45.542 100.254,44.921 100.813,44.921 ; 100.813,44.921 101.397,44.921 cw(c101.397,44.896) 101.422,44.896 ; J5.2@100.813,56.171 101.397,56.171 ccw(c101.397,56.196) J5.2@101.422,56.196 ; J5.2@100.813,56.171 100.813,55.55 cw(c100.533,55.55) 100.533,55.27 cw(c100.533,55.55) 100.254,55.55 100.254,56.171 J5.2@100.813,56.171 ; 101.422,44.896 101.422,45.517 cw(c101.702,45.517) 101.702,45.796 cw(c101.702,45.517) 101.981,45.517 101.981,44.896 101.422,44.896 ; J5.2@101.422,56.196 101.422,55.575 ccw(c101.702,55.575) 101.702,55.296 ccw(c101.702,55.575) 101.981,55.575 101.981,56.196 J5.2@101.422,56.196 ; 103.403,44.87 103.403,45.491 ccw(c103.124,45.491) 103.124,45.771 ccw(c103.124,45.491) 102.845,45.491 102.845,44.87 103.403,44.87 ; 103.403,44.87 103.988,44.87 cw(c103.988,44.845) 104.013,44.845 ; J5.2@103.403,56.222 103.403,55.601 cw(c103.124,55.601) 103.124,55.321 cw(c103.124,55.601) 102.845,55.601 102.845,56.222 J5.2@103.403,56.222 ; J5.2@103.403,56.222 103.988,56.222 ccw(c103.988,56.247) J5.2@104.013,56.247 ; 104.013,44.845 104.013,45.466 cw(c104.292,45.466) 104.292,45.745 cw(c104.292,45.466) 104.572,45.466 104.572,44.845 104.013,44.845 ; J5.2@104.013,56.247 104.013,55.626 ccw(c104.292,55.626) 104.292,55.347 ccw(c104.292,55.626) 104.572,55.626 104.572,56.247 J5.2@104.013,56.247
in: C43.2 pad.in | length 2.9
  Top Layer w1.397: C43.2@85.593,58.742 pad.in@85.593,61.6
NetC41_1: C41.1 J5.1 | length 7.5
  Top Layer w1.397: C41.1@96.4,52.316 J5.1 J5.1@103.898,52.316
NetC41_2: C41.2 C45.1 L1.1 | length 2.2
  Top Layer w1.397: L1.1@92.274,52.341 C41.2@94.509,52.341
NetC42_1: C42.1 C46.1 L1.2 | length 1.9
  Top Layer w1.397: C42.1@88.464,52.341 89.403,52.341 L1.2@90.348,52.341
NetC42_2: C42.2 R44.1 R45.1 | length 2.1
  Top Layer w1.143: R45.1@85.568,52.381 ccw(c85.607,52.381) R45.1
  Top Layer w1.397: R45.1@85.568,52.381 R44.1 ; R45.1 C42.2@86.584,52.341
NetC43_1: C43.1 R44.2 R46.1 | length 1.7
  Top Layer w1.397: R44.2@85.568,55.161 C43.1@85.568,56.888
NetC44_2: C44.2 C48.1 J6.1 | length 15.6
  Top Layer w1.397: J6.1@17.563,50.662 C44.2@32.905,50.662 ; C44.2@32.905,50.74 cw(c32.905,50.613) C44.2@33.021,50.664 ; C44.2 ccw(c32.905,50.613) C44.2@33.021,50.664 ; C44.2@33.108,50.664 C44.2@33.021,50.664
NetC63_1: C63.1 C64.1 C65.1 C66.1 FB6.2 L3.1
NetC70_1: C70.1 C71.1 C72.1 C73.1 FB7.2 L4.1
out: C44.1 C47.1 pad.out | length 16.1
  Top Layer w1.397: C44.1 38.264,50.613 ccw(c38.264,52.449) 40.095,52.317 ; 40.095,52.292 40.095,52.317 ; 40.095,52.439 pad.out ; 40.1,52.449 cw(c38.264,52.449) 40.095,52.317
Vcc1: C60.1 C61.1 C62.1 FB6.1 pad.Vcc1
Vcc2: C67.1 C68.1 C69.1 FB7.1 pad.Vcc2
Vin: C56.1 C57.1 C58.1 C59.1 C74.1 C75.1 C76.1 C77.1 J1.1 J1.3 L3.2 L4.2 | length 45.7
  Top Layer w1.27: 47.213,42.212 48.209,43.208 C77.1 cw(c47.65,44.196) C77.1@47.65,43.637
  Top Layer w2.54: 46.893,43.532 ccw(c49.784,43.532) 46.914,43.188 ; 46.914,45.136 46.914,44.196 46.914,43.188 ; J1.3@59.084,40.642 49.784,40.642 cw(c49.784,43.532) 47.213,42.212 cw(c49.784,43.532) 46.914,43.188 ; J1.3 62.386,43.993 65.782,43.993 J1.1 ; J1.1@69.084,40.642 75.184,40.642 ccw(c75.184,43.532) 78.075,43.532 78.075,46.837

## Polygon pours and split planes (outlines as drawn)
GND on Bottom Layer "Bottom Layer-GND" (solid, remove dead copper, pour order 4): 16.098,37.719 104.849,37.719 104.826,68.961 15.873,68.961

## Other copper
Top Layer:
  region net Vcc1: 77.601,59.514 ccw(c77.601,59.26) 77.347,59.26 77.347,56.364 ccw(c78.058,56.364) 78.058,55.653 78.693,55.653 ccw(c78.693,56.161) 79.201,56.161 79.201,59.031 ccw(c78.744,59.031) 78.744,59.488
  region net NetC63_1: 78.243,54.671 ccw(c78.38,53.583) 77.292,53.445 77.292,51.435 77.495,50.14 78.865,50.19 79.146,51.511 79.146,53.492 ccw(c78.105,53.63)
  region net Vin: 48.133,45.11 48.133,45.669 ccw(c47.473,45.669) 47.473,46.33 cw(c47.473,46.584) 47.219,46.584 47.219,48.354 ccw(c46.694,48.091) 46.431,48.616 46.101,48.539 ccw(c46.101,48.311) 45.872,48.311 45.872,47.142 cw(c45.72,47.142) 45.72,46.99 45.72,44.653 ccw(c47.295,44.653) 47.295,43.078
  region net NetC70_1: 45.872,50.038 45.75,51.405 ccw(c45.479,51.443) 45.517,51.714 45.517,53.7 cw(c47.146,53.746) 46.655,55.3 cw(c46.59,54.573) 47.317,54.508 47.205,50.456 cw(c46.935,50.456) 46.935,50.186
  region net Vcc2: 47.9,55.6 48.3,56.5 48.553,58.5 48.52,59.896 ccw(c48.419,59.896) 48.419,59.998 46.615,59.998 46.615,57.3 46.655,56.136
  region net Vin: 77.555,49.225 77.013,47.295 ccw(c76.979,47.214) 76.898,47.18 76.81,45.804 ccw(c77.601,45.554) 77.351,44.762 80.252,44.762 ccw(c80.252,45.804) 81.294,45.804 81.294,47.459 ccw(c81.019,47.459) 81.019,47.734 cw(c80.624,49.517) 78.842,49.124 78.842,49.276

## Silkscreen, mask and mechanical layers (free items; w line width, h text height)
Top Overlay:
  text "Motorola / MHW720A1" at 56.2,57.2 h3.81
  text "Vin = 15.5V" at 33.7,42.1 h3.05
  text "25 W PA" at 76.53,41.021 h3
  text "Vin" at 31.691,39.095 h2.54
  text "GND" at 36.185,39.095 h2.54
  text "Vin" at 41.291,39.095 h2.54
  text "400-440 MHz" at 76.327,38.583 h3
Bottom Solder:
  region: 22.771,69.291 22.771,37.744 98.996,37.744 98.996,69.291
Mechanical 1:
  the board outline again, w0.254

## Text inside footprints (layer, text, board x,y; h text height)
C41: Mechanical 17 "d" at 96.363,52.214 h0.25; Mechanical 19 "-" at 96.363,52.214 h0.25
C42: Mechanical 17 "d" at 88.413,52.214 h0.25; Mechanical 19 "-" at 88.413,52.214 h0.25
C43: Mechanical 17 "d" at 85.466,56.913 h0.25 r270; Mechanical 19 "-" at 85.466,56.913 h0.25 r270
C44: Mechanical 17 "d" at 36.384,50.486 h0.38; Mechanical 19 "-" at 36.384,50.486 h0.38
C45: Mechanical 17 "d" at 93.518,52.494 h0.25 r90
C46: Mechanical 17 "d" at 89.429,52.494 h0.25 r90
C47: Mechanical 17 "d" at 38.213,50.537 h0.25 r90
C48: Mechanical 17 "d" at 31.558,50.449 h0.25 r90
C56: Mechanical 17 "d" at 77.408,44.579 h0.25 r180; Mechanical 19 "-" at 77.408,44.579 h0.25 r180
C57: Mechanical 17 "d" at 77.4,45.974 h0.25 r180; Mechanical 19 "-" at 77.4,45.974 h0.25 r180
C58: Mechanical 17 "d" at 77.382,47.042 h0.25 r180; Mechanical 19 "-" at 77.382,47.042 h0.25 r180
C59: Mechanical 17 "d" at 84.422,46.177 h0.51 r180; Mechanical 19 "-" at 84.422,47.193 h0.51 r180
C60: Mechanical 17 "d" at 77.78,57.642 h0.25 r180; Mechanical 19 "-" at 77.78,57.642 h0.25 r180
C61: Mechanical 17 "d" at 78.642,57.482 h0.25; Mechanical 19 "-" at 78.642,57.482 h0.25
C62: Mechanical 17 "d" at 77.755,58.861 h0.25 r180; Mechanical 19 "-" at 77.755,58.861 h0.25 r180
C63: Mechanical 17 "d" at 78.633,51.64 h0.25; Mechanical 19 "-" at 78.633,51.64 h0.25
C64: Mechanical 17 "d" at 77.795,51.894 h0.25 r180; Mechanical 19 "-" at 77.795,51.894 h0.25 r180
C65: Mechanical 17 "d" at 78.658,52.834 h0.25; Mechanical 19 "-" at 78.658,52.834 h0.25
C66: Mechanical 17 "d" at 77.795,53.088 h0.25 r180; Mechanical 19 "-" at 77.795,53.088 h0.25 r180
C67: Mechanical 17 "d" at 47.149,57.839 h0.25 r180; Mechanical 19 "-" at 47.149,57.839 h0.25 r180
C68: Mechanical 17 "d" at 47.123,59.058 h0.25 r180; Mechanical 19 "-" at 47.123,59.058 h0.25 r180
C69: Mechanical 17 "d" at 48.012,58.804 h0.25; Mechanical 19 "-" at 48.012,58.804 h0.25
C70: Mechanical 17 "d" at 46.863,51.968 h0.25; Mechanical 19 "-" at 46.863,51.968 h0.25
C71: Mechanical 17 "d" at 46.025,52.222 h0.25 r180; Mechanical 19 "-" at 46.025,52.222 h0.25 r180
C72: Mechanical 17 "d" at 46.863,53.162 h0.25; Mechanical 19 "-" at 46.863,53.162 h0.25
C73: Mechanical 17 "d" at 46.025,53.416 h0.25 r180; Mechanical 19 "-" at 46.025,53.416 h0.25 r180
C74: Mechanical 17 "d" at 46.228,45.618 h0.25 r180; Mechanical 19 "-" at 46.228,45.618 h0.25 r180
C75: Mechanical 17 "d" at 47.015,46.558 h0.25; Mechanical 19 "-" at 47.015,46.558 h0.25
C76: Mechanical 17 "d" at 46.216,46.812 h0.25 r180; Mechanical 19 "-" at 46.216,46.812 h0.25 r180
C77: Mechanical 17 "d" at 52.273,43.942 h0.51 r180; Mechanical 19 "-" at 52.273,44.958 h0.51 r180
FB6: Mechanical 17 "d" at 77.693,56.415 h0.25 r270; Mechanical 19 "-" at 77.693,56.415 h0.25 r270
FB7: Mechanical 17 "d" at 46.898,56.899 h0.25 r250; Mechanical 19 "-" at 46.898,56.899 h0.25 r250
J1: Mechanical 17 "d" at 70.902,40.945 h1.02 r180; Mechanical 19 "-" at 70.902,40.945 h1.02 r180
J5: Mechanical 17 "d" at 108.544,52.141 h0.38; Mechanical 19 "-" at 108.544,52.141 h0.38
J6: Mechanical 17 "d" at 12.942,50.811 h0.38 r180; Mechanical 19 "-" at 12.942,50.811 h0.38 r180
L1: Mechanical 17 "d" at 92.324,51.96 h0.25; Mechanical 19 "-" at 92.324,51.96 h0.25
L3: Mechanical 17 "d" at 77.902,50.786 h0.25 r270; Mechanical 19 "-" at 77.902,50.786 h0.25 r270
L4: Mechanical 17 "d" at 46.249,50.394 h0.25 r270; Mechanical 19 "-" at 46.249,50.394 h0.25 r270
R44: Mechanical 17 "d" at 85.695,53.408 h0.25 r270; Mechanical 19 "-" at 85.187,53.408 h0.25 r270
R45: Mechanical 17 "d" at 85.644,52.468 h0.25; Mechanical 19 "-" at 85.644,51.96 h0.25
R46: Mechanical 17 "d" at 85.644,56.101 h0.25; Mechanical 19 "-" at 85.644,55.593 h0.25